# Altium PCB Uno_2022-03-31.pcbdoc
Units mil, origin at the board's own origin, x right, y up, seen from the top; angles counter-clockwise.
Board outline 3976.73 x 3110 mil, 2 copper layers (Top Layer, Bottom Layer); 40 components, 49 nets, 235 pads, 163 vias.
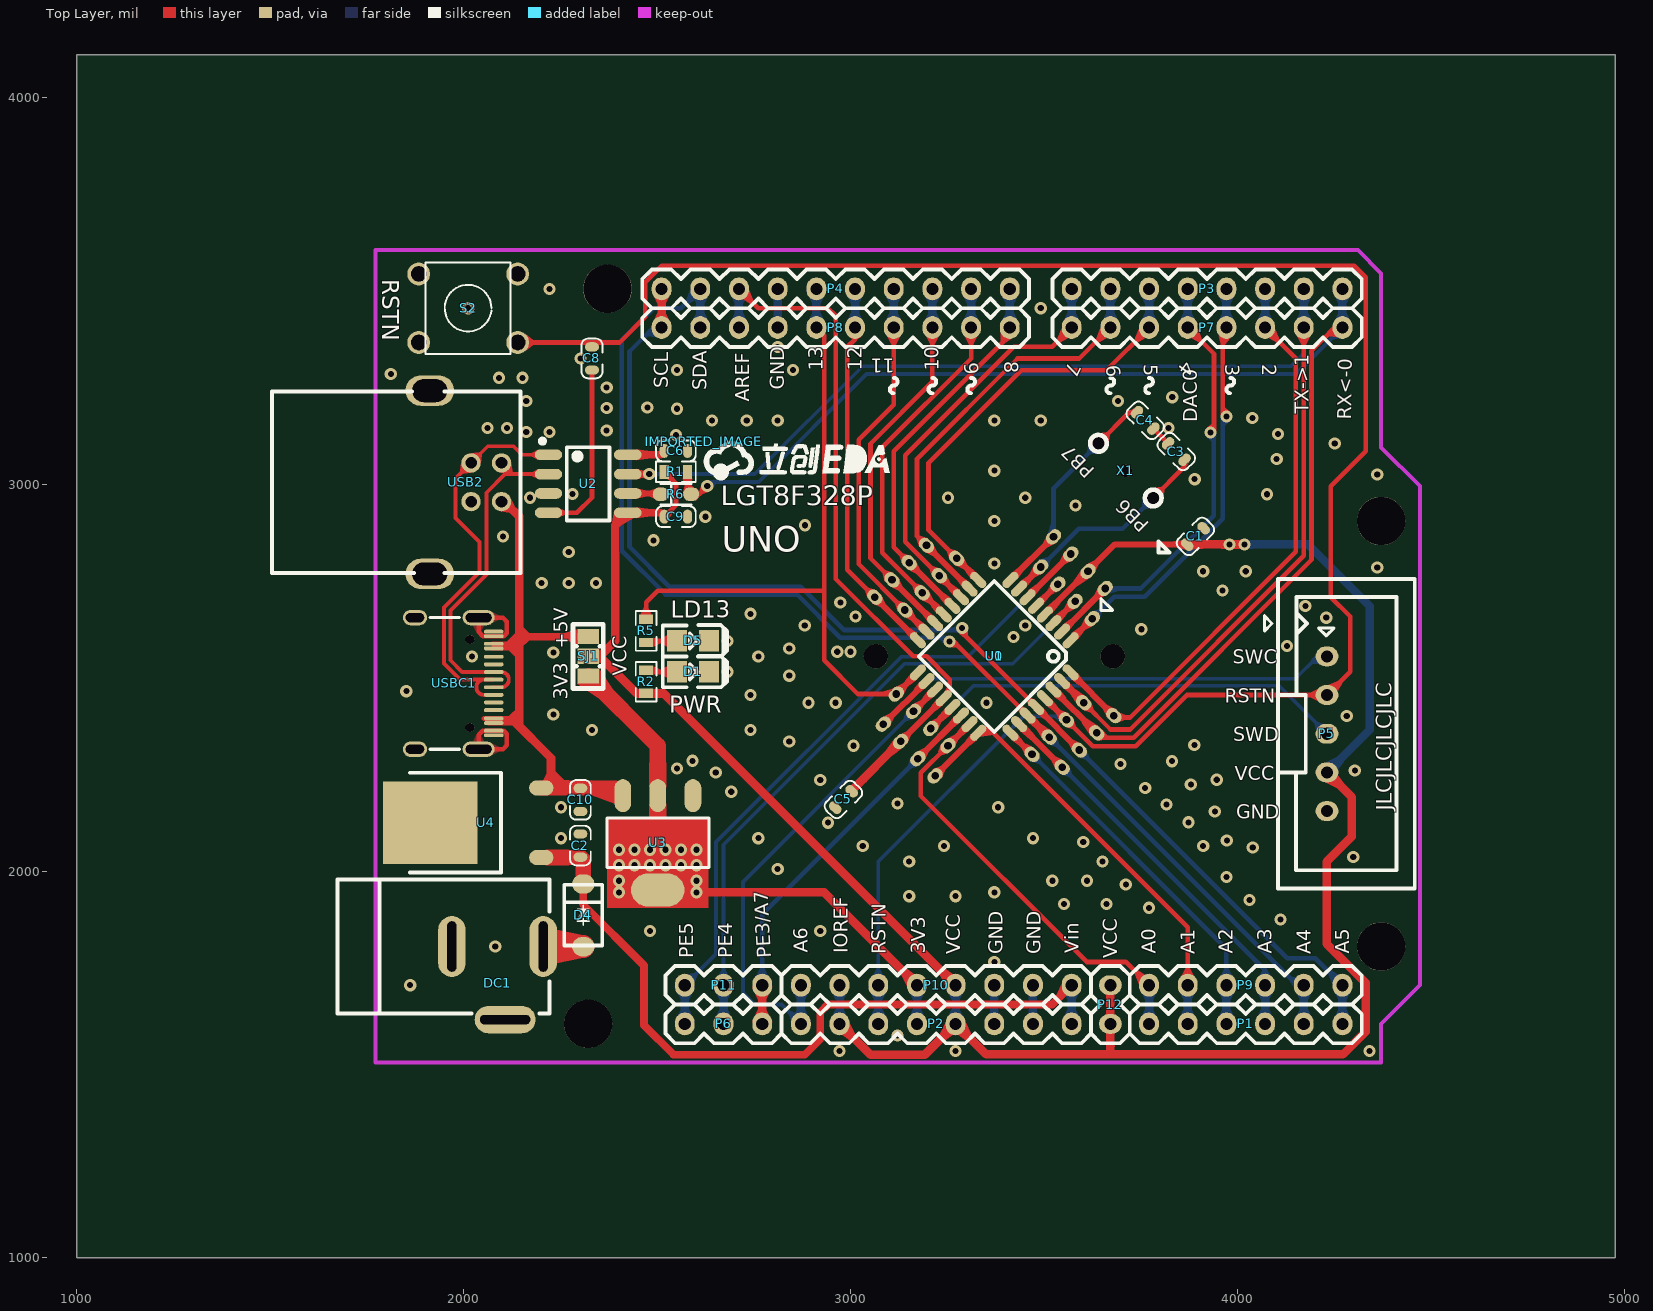
[diagram p0: Top Layer view]
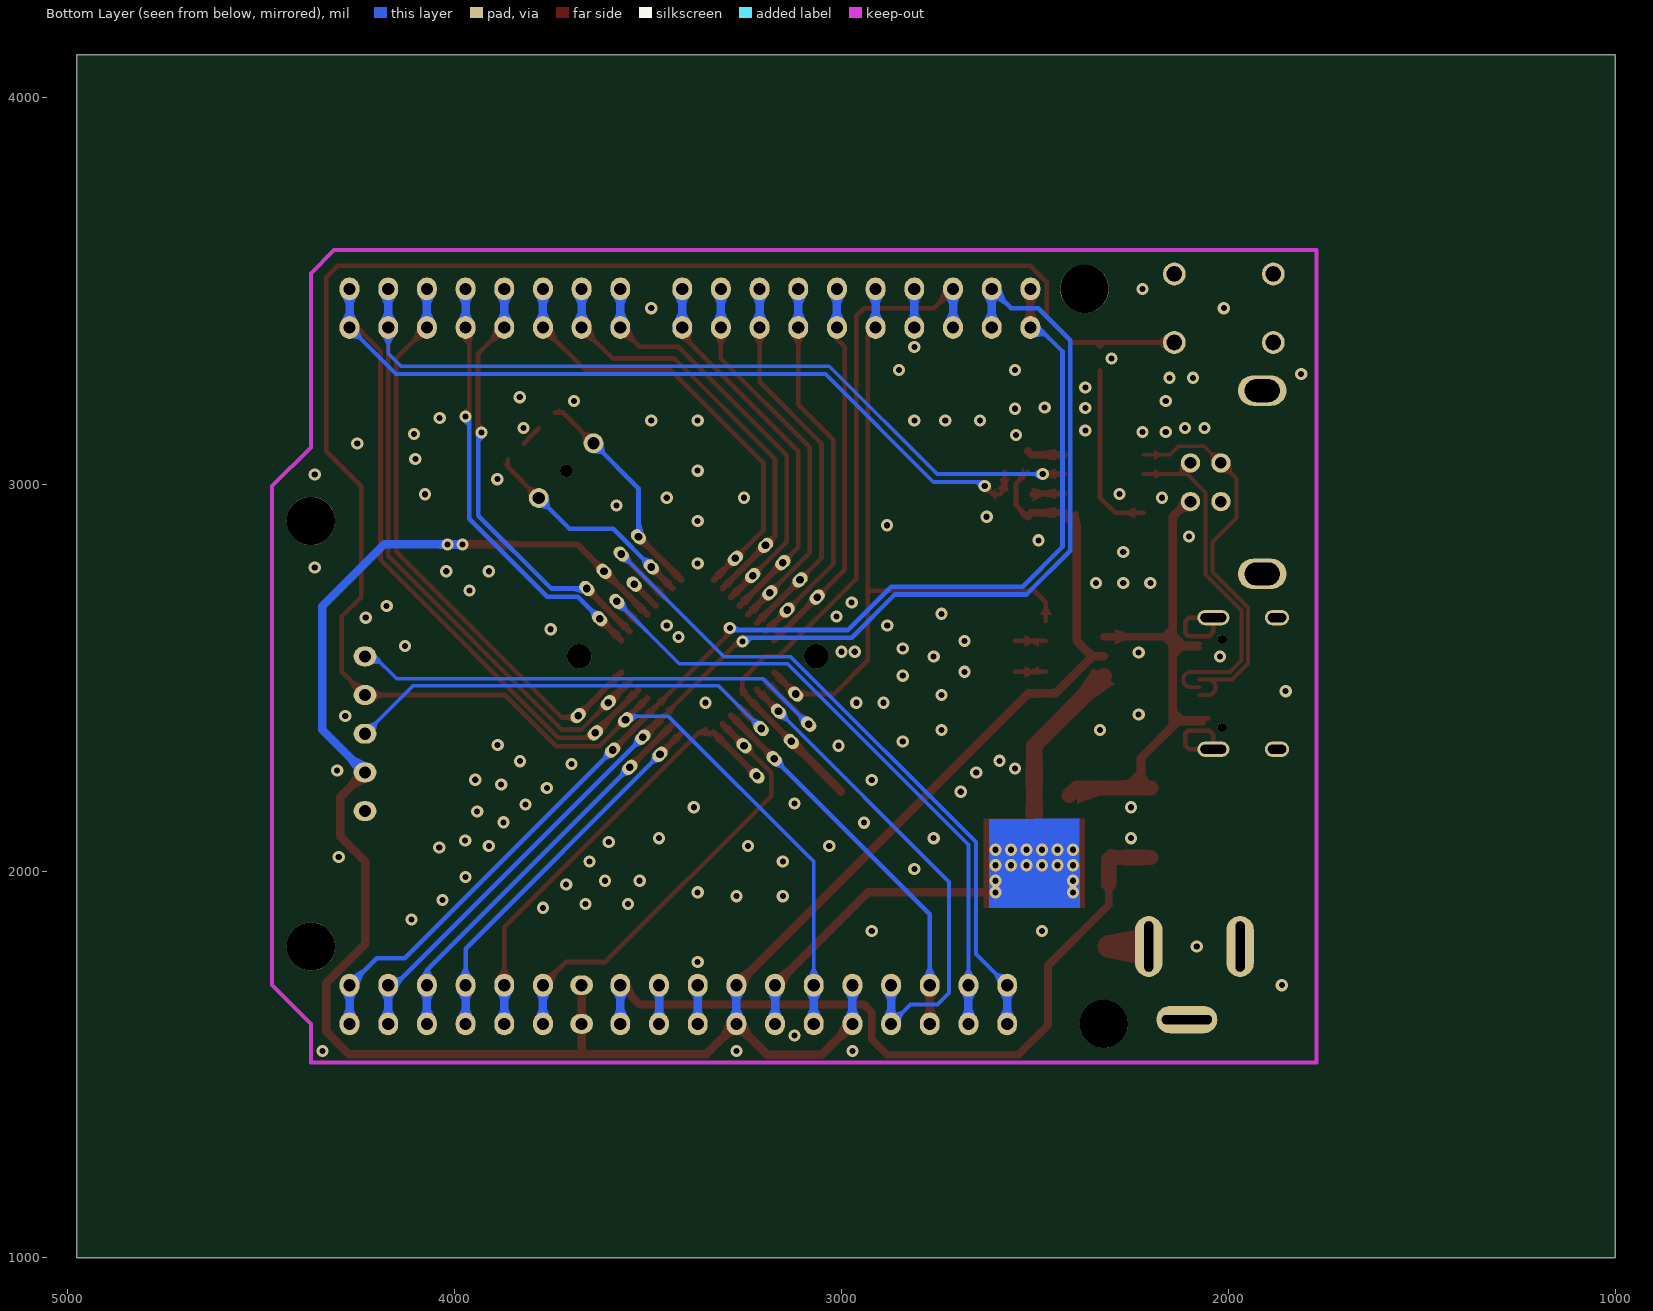
[diagram p1: Bottom Layer view, seen from below]

## Layer stack, top to bottom
Top Layer: signal copper (thickness not stored)
Dielectric: dielectric 12.6, FR-4, Dk 4.8
Bottom Layer: signal copper (thickness not stored)

## Board outline
4976.73,1000 1000,1000 1000,4110 4976.73,4110

## Components (designator, comment, footprint, x,y, rotation, side; value= is the part's Value field where it differs from the comment)
C1 "10uF" C0603 3891.73,2865 r225 top
C2 "10uF" C0603 2301.73,2066 r270 top
C3 "22pF" C0603 3842.24,3084.5 r135 top
C4 "22pF" C0603 3761.73,3165 r315 top
C5 "100nF" C0603 2981.73,2185 r225 top
C6 "100nF" C0603 2548.73,3086.1 r0 top
C8 "100nF" C0603 2331.73,3325 r90 top
C9 "100nF" C0603 2548.73,2916.1 r0 top
C10 "10uF" C0603 2301.73,2184 r90 top
D1 "LED" LED-0805 2592.43,2515.05 r180 top
D4 "SS34" SMA(DO-214AC) 2309.23,1889.5 r90 top
D5 "LED" LED-0805 2592.43,2595.05 r180 top
DC1 "DC005-2.5MM" DC-IN-TH_DC-5520-AK 2221.73,1805 r90 top
IMPORTED_IMAGE "IMPORTED_IMAGE" IMPORTED_IMAGE 2620.98,3110.37 r0 top
P1 "Header-Male-2.54_1x6" 1X6_0.8N 4021.73,1605 r0 top
P2 "Header-Male-2.54_1x8" 1X8_0.8N 3221.73,1605 r180 top
P3 "Header-Male-2.54_1x8" 1X8_0.8N 3921.73,3505 r0 top
P4 "Header-Male-2.54_1x10" 1X10_0.8N_100MIL 2961.73,3505 r0 top
P5 "LGT-Link-2.54-2X5P" HDR-IDC-2.54-2X5P-AK_HR 4281.73,2355 r270 top
P6 "Header-Female-2.54_1x3" 1X3_0.8N_100MIL 2671.73,1605 r0 top
P7 "Header-Male-2.54_1x8" 1X8_0.8N 3921.73,3405 r0 top
P8 "Header-Male-2.54_1x10" 1X10_0.8N_100MIL 2961.73,3405 r0 top
P9 "Header-Male-2.54_1x6" 1X6_0.8N 4021.73,1705 r0 top
P10 "Header-Male-2.54_1x8" 1X8_0.8N 3221.73,1705 r180 top
P11 "Header-Female-2.54_1x3" 1X3_0.8N_100MIL 2671.73,1705 r0 top
P12 "Header-Female-2.54_1x2" 1X2_0.8N 3671.73,1655 r90 top
R1 "10K" R0603W 2548.73,3032.1 r180 top
R2 "1k" R0603W 2471.73,2489.4 r270 top
R5 "1k" R0603W 2471.73,2620.6 r90 top
R6 "1k" SOD-323_L1.8-W1.3-LS2.5-A 2548.73,2974.1 r0 top
S2 "TS665CJ-A" SW-TH_4PIN-L6.00-W6.00 2011.73,3455 r0 top
SJ1 "JUMPER-PAD-3-2OF3_NC_BY_PASTE" JUMPER_SOLDER 2321.73,2555 r90 top
U0 "LGT8F328P_Socket_LQFP32" QFP32-0.8-TP01NT 3371.73,2555 r135 top
U1 "LGT8F328P-QFP32L" TQFP32-08-CMJ-CHECKOK 3371.73,2555 r225 top
U2 "CH340N" SOP8_150MIL_JX 2321.73,3001.1 r270 top
U3 "1117-3.3" SOT-223_L6.5-W3.5-P2.30-LS7.0-BR 2502.23,2073 r90 top
U4 "7805" TO252 2011.73,2125 r90 top
USB2 "USB B 90" USB-M-49-AK 2146.73,3005 r90 top
USBC1 "TYPE-C-31-M-12" USB-TYPE-C_16PIN-MALE-TYPE-C-31-M-12-AK 1771.73,2485 r270 top
X1 "16MHz" OSC-49S-A 3711.73,3035 r315 top

## Footprints (in the part's own frame and the unit in brackets; to place one, negate y for a bottom-side part, rotate by r counter-clockwise, add the part's x,y. Pads: shape width x height; smd on the part's side, far side on the other; paste and mask are expansions set on the pad)
1X2_0.8N [mm]
  oval 1.3x1.5 hole 0.8: 1(-1.27,0) 2(1.27,0)
  silkscreen extent -2.54,-1.27 2.54,1.27
1X3_0.8N_100MIL [mm]
  oval 1.3x1.5 hole 0.8: 1(-2.54,0) 2(0,0) 3(2.54,0)
  silkscreen extent -3.81,-1.27 3.81,1.27
1X6_0.8N [mm]
  oval 1.3x1.5 hole 0.8: 1(-6.35,0) 2(-3.81,0) 3(-1.27,0) 4(1.27,0) 5(3.81,0) 6(6.35,0)
  silkscreen extent -7.62,-1.27 7.62,1.27
1X8_0.8N [mm]
  oval 1.3x1.5 hole 0.8: 1(-8.89,0) 2(-6.35,0) 3(-3.81,0) 4(-1.27,0) 5(1.27,0) 6(3.81,0) 7(6.35,0) 8(8.89,0)
  silkscreen extent -10.16,-1.27 10.16,1.27
1X10_0.8N_100MIL [mm]
  oval 1.3x1.5 hole 0.8: 1(-11.43,0) 2(-8.89,0) 3(-6.35,0) 4(-3.81,0) 5(-1.27,0) 6(1.27,0) 7(3.81,0) 8(6.35,0) 9(8.89,0) 10(11.43,0)
  silkscreen extent -12.7,-1.27 12.7,1.27
C0603 [mil]
  oval 24x36 smd: 1(-30,0) 2(30,0)
  silkscreen extent -51,-27 51,27
DC-IN-TH_DC-5520-AK [mm]
  oval 4x1.8 hole 0.6 slot 3.3 at 0 deg: 1(0,0.406) 2(0,6.406)
  oval 1.8x4 hole 0.6 slot 3.3 at 90 deg: 3(-4.8,2.906)
  silkscreen extent -4.4,0 4.4,13.91
HDR-IDC-2.54-2X5P-AK_HR [mm]
  oval 1.3x1.5 hole 0.8: 1(-5.08,-1.27) 3(-2.54,-1.27) 5(0,-1.27) 7(2.54,-1.27) 9(5.08,-1.27)
  silkscreen extent -10.16,-4.5 10.16,4.5
IMPORTED_IMAGE [mil]
  silkscreen extent 0,-100 480,0
JUMPER_SOLDER [mil]
  rect 39.37x56 smd: 1(-51,0) 2(0,0) 3(51,0)
  silkscreen extent -83,-39 83,39
LED-0805 [mil]
  rect 51.2x55.1 smd: 1(40.7,0.05) 2(-42,0.05)
  silkscreen extent -88,-41 78,40
OSC-49S-A [mm]
  round 1.3 hole 0.8: 1(-2.54,0) 2(2.54,0)
  round 0.8 hole 0.8 unplated: ""(0,0)
  silkscreen extent -3.09,-0.55 3.09,0.55
QFP32-0.8-TP01NT [mm]
  oval 0.8x1.1 hole 0.5: 1(-2.8,-6.3) 2(-2,-8.3) 3(-1.2,-6.3) 4(-0.4,-8.3) 5(0.4,-6.3) 6(1.2,-8.3) 7(2,-6.3) 8(2.8,-8.3) 17(2.8,6.3) 18(2,8.3) 19(1.2,6.3) 20(0.4,8.3) 21(-0.4,6.3) 22(-1.2,8.3) 23(-2,6.3) 24(-2.8,8.3)
  oval 1.1x0.8 hole 0.5: 9(6.3,-2.8) 10(8.3,-2) 11(6.3,-1.2) 12(8.3,-0.4) 13(6.3,0.4) 14(8.3,1.2) 15(6.3,2) 16(8.3,2.8) 25(-6.3,2.8) 26(-8.3,2) 27(-6.3,1.2) 28(-8.3,0.4) 29(-6.3,-0.4) 30(-8.3,-1.2) 31(-6.3,-2) 32(-8.3,-2.8)
  round 1.6 hole 1.6 unplated: ""(-5.5,-5.5) ""(5.5,5.5)
  silkscreen extent -3.31,-12.95 -2.29,-12.45
R0603W [mil]
  rect 24x36 smd: 1(-30,0) 2(30,0)
  silkscreen extent -51,-27 51,27
SMA(DO-214AC) [mil]
  oval 50x57.9 smd: 1(-85,0) 2(77,0)
  silkscreen extent -82,-49 75,49
SOD-323_L1.8-W1.3-LS2.5-A [mil]
  oval 42.13x36 smd: 1(-39,0) 2(39,0)
  silkscreen extent -39,-28 39,28
SOP8_150MIL_JX [mm]
  oval 0.7x1.8 smd: 1(-1.905,-2.601) 2(-0.635,-2.601) 3(0.635,-2.601) 4(1.905,-2.601) 5(1.905,2.601) 6(0.635,2.601) 7(-0.635,2.601) 8(-1.905,2.601)
  silkscreen extent -2.95,-3.15 2.4,1.4
SOT-223_L6.5-W3.5-P2.30-LS7.0-BR [mil]
  oval 85x43 smd: 1(122,-90.5) 2(122,0.5) 3(122,90.5)
  oval 85x138 smd: 4(-122,0.5)
  silkscreen extent -64,-132 64,132
SW-TH_4PIN-L6.00-W6.00 [mil]
  round 59.05 hole 39.36: 1(-127.95,88.59) 2(127.95,88.59) 3(-127.95,-88.59) 4(127.95,-88.59)
  silkscreen extent -111,-118 110,118
TO252 [mil]
  oval 39.4x63 smd: 1(-90,-189) 2(90,-189)
  rect 212.6x244.1 smd: 3(0,98)
  silkscreen extent -129,-85 129,151
TQFP32-08-CMJ-CHECKOK [mil]
  oval 50x22 smd: 1(-169,110.17) 2(-169.07,78.7) 3(-169,47.23) 4(-169,15.7) 5(-169,-15.84) 6(-169,-47.23) 7(-169,-78.63) 8(-169,-110.17) 17(169,-110.17) 18(169.07,-78.7) 19(169,-47.23) 20(169,-15.84) 21(169,15.7) 22(169,47.23) 23(169.07,78.7) 24(169,110.17)
  oval 22x50 smd: 9(-110.17,-169) 10(-78.63,-169) 11(-47.23,-169) 12(-15.7,-169) 13(15.84,-169) 14(47.23,-169) 15(78.7,-169.07) 16(110.17,-169) 25(110.17,169) 26(78.7,169.07) 27(47.23,169) 28(15.84,169) 29(-15.7,169) 30(-47.23,169) 31(-78.7,169.07) 32(-110.17,169)
  silkscreen extent -138,-138 138,138
USB-M-49-AK [mil]
  round 50 hole 30: 1(-50,48.82) 2(50,48.82) 3(50,127.56) 4(-50,127.56)
  oval 78.74x125.98 hole 59.06 slot 90.55 at 90 deg: 5(-237.01,234.25) 6(237.01,234.25)
  silkscreen extent -235,0 235,642
USB-TYPE-C_16PIN-MALE-TYPE-C-31-M-12-AK [mm]
  oval 1x2.1 hole 0.6 slot 1.7 at 90 deg: 0(-4.32,6.78) 0(4.32,6.78)
  oval 1x1.6 hole 0.6 slot 1.2 at 90 deg: 0(-4.32,2.6) 0(4.32,2.6)
  oval 0.25x1.3 smd: A1(-3.4,7.77) A4(-2.6,7.77) A5(-1.25,7.77) A6(-0.25,7.77) A7(0.25,7.77) A8(1.25,7.77) A9(2.6,7.77) A12(3.4,7.77) B1(3.1,7.77) B4(2.3,7.77) B5(1.75,7.77) B6(0.75,7.77) B7(-0.75,7.77) B8(-1.75,7.77) B9(-2.3,7.77) B12(-3.1,7.77)
  round 0.6 hole 0.6 unplated: ""(-2.89,6.2) ""(2.89,6.2)
  silkscreen extent -4.32,3.61 4.32,5.52

## Free pads (board coordinates)
  round 125 hole 125 unplated: ""(2321.73,1605) ""(2371.73,3505) ""(4371.73,1805) ""(4371.73,2905)

## Via types
v1: diameter 31.5, hole 15.75, Top Layer to Bottom Layer, tented both sides, 163 vias

## Nets (pads, with @x,y where several pads share a name; then routed paths per layer and width w, separated by ;. In a path a pad name is that pad's centre, name@x,y a point inside that pad or via, vN(x,y) a via of type N, cw(c..) or ccw(c..) an arc to the next point about the centre after c; other vN are vias at no path point)
3V: C6.1 U2.8 | length 98.7
  Top Layer w20: U2.8 2508.73,3076.1 C6.1
3V3: P2.5 P10.5 SJ1.1 U3.2 U3.4 | length 1395
  Top Layer w22: v1(2601.73,1945) 2931.73,1945 P10.5
  Top Layer w43: SJ1.1 2501.73,2324 U3.2 ; U3.4 U3.2@2501.73,2193
  Bottom Layer w22: P2.5 P10.5
  other v1: 2401.73,1945 2401.73,1975 2601.73,1975 2401.73,2015 2441.73,2015 2481.73,2015 2521.73,2015 2561.73,2015 2601.73,2015 2401.73,2055 2441.73,2055 2481.73,2055 2521.73,2055 2561.73,2055 2601.73,2055
$BOARDOUTLINENET: 
+5V: C10.2 SJ1.3 U3.3 U4.2 USB2.1 USBC1.A4 USBC1.A9 USBC1.B4 USBC1.B9 | length 3057.2
  Top Layer w12: USBC1.B4@2052.28,2394.45 2074.69,2394.45 2119.21,2394.45 2148.73,2423.97 ; USBC1.A9@2064.1,2382.63 USBC1.A9@2074.69,2382.63 ; USBC1.B9@2074.69,2575.55 2140.28,2575.55 2170.73,2606 2148.73,2628 2148.73,2664.4 ; USBC1.A4@2074.69,2587.36 2124.09,2587.36 2151.73,2615 2151.73,2625 ; USBC1.A9@2074.73,2382.6 2128.13,2382.6 ; USBC1.B4@2074.73,2394.5 2130.73,2394.5 2231.73,2293.5 2231.73,2255 2273.73,2213 2301.73,2213 2220.73,2213 2220.73,2290 2128.13,2382.6 ; USBC1.B9@2074.73,2575.5 USBC1.B9@2102.23,2575.5 ; USBC1.B9@2095.9,2575.55 2118.84,2575.55 2148.73,2545.66 ; 2104.13,2587.4 2113.63,2587.4 2138.73,2612.5 2138.73,2914.2 USB2.1 2111.73,2955 2148.73,2918 2148.73,2622 USBC1.B9@2102.23,2575.5 ; 2104.93,2578.2 USBC1.B9@2102.23,2575.5 ; 2138.73,2644.66 2138.73,2393.2 2128.13,2382.6 ; 2148.73,2362.88 2148.73,2649.45 ; 2220.73,2251.09 2257.82,2214 C10.2
  Top Layer w20: 2131.73,2585 2152.73,2606 2170.73,2606 SJ1.3
  Top Layer w39.37: U4.2 2391.73,2215 U3.3
A0: P1.1 P9.1 U0.23 U1.23 | length 1130.6
  Top Layer w12: U0.23@3252.03,2324 3181.73,2253.7 3181.73,2194 3610.73,1765 3711.73,1765 P9.1
  Top Layer w16: U0.23@3252.03,2324 U1.23
  Bottom Layer w22: P1.1 P9.1
A1: P1.2 P9.2 U0.24 U1.24 | length 1315.4
  Top Layer w12: U0.24@3218.53,2246 U1.24 3369.13,2357.6 3871.73,1855 P9.2
  Top Layer w16: U0.24@3218.53,2246 U1.24
  Bottom Layer w22: P1.2 P9.2
A2: P1.3 P9.3 U0.25 U1.25 | length 983.9
  Top Layer w16: U1.25 U0.25@3469.13,2301.7
  Bottom Layer w12: U0.25@3469.13,2301.7 3971.73,1799.2 P9.3
  Bottom Layer w22: P1.3 P9.3
A3: P1.4 P9.4 U0.26 U1.26 | length 1038.3
  Top Layer w16: U1.26 U0.26
  Bottom Layer w12: U0.26 4071.73,1743.7 P9.4
  Bottom Layer w22: P1.4 P9.4
A4/SDA: P1.5 P4.2 P8.2 P9.5 U0.27 U1.27 | length 3236.1
  Top Layer w12: v1(3255.73,2593) 3266.93,2593 U1.27
  Top Layer w16: U1.27 U0.27@3513.73,2346.3
  Bottom Layer w12: P4.2 2561.73,3455 2491.73,3455 2408.73,3372 2408.73,2828 2521.73,2715 2861.73,2715 2973.73,2603 3255.73,2603 v1(3255.73,2593) ; U0.27@3513.73,2346.3 4155.03,1705 P9.5
  Bottom Layer w22: P8.2 P4.2 ; P1.5 P9.5
A5/SCL: P1.6 P4.1 P8.1 P9.6 U0.28 U1.28 | length 3137.3
  Top Layer w12: v1(3288.73,2628) 3288.73,2615.6 U1.28
  Top Layer w16: U1.28 U0.28
  Top Layer w22: P8.1 P4.1
  Bottom Layer w12: P8.1 2490.73,3405 2428.73,3343 2428.73,2838 2531.73,2735 2871.73,2735 2983.73,2623 3283.73,2623 v1(3288.73,2628) ; U0.28 4129.53,1775 4201.73,1775 P9.6
  Bottom Layer w22: P1.6 P9.6
A6: P2.8 P10.8 U0.19 U1.19 | length 1272.9
  Top Layer w16: U0.19@3163.03,2413 U1.19
  Bottom Layer w10: P2.8 2821.73,1655 2751.73,1655 2721.73,1685 2721.73,1971.7 U0.19@3163.03,2413
  Bottom Layer w22: P2.8 P10.8
AREF: C5.1 P4.3 P8.3 U0.20 U1.20 | length 1856.5
  Top Layer w12: P4.3 2761.73,3455 2941.73,3455 2961.73,3435 2961.73,2755 3161.73,2555 3196.73,2555 3256.73,2495 3256.73,2462.4 U1.20
  Top Layer w16: U0.20@3129.53,2335 U1.20
  Top Layer w22: C5.1@3002.23,2205.5 3002.23,2207.7 U0.20@3129.53,2335
  Bottom Layer w22: P8.3 P4.3
D0/RX: P3.8 P7.8 R1.1 R6.2 U0.30 U1.30 | length 3576.1
  Top Layer w12: R1.1 2578.73,2986.34 2590.97,2974.1 2608.83,2974.1 v1(2629.73,2995) ; U0.30 3648.53,2345 3731.73,2345 4191.73,2805 4191.73,3345 4251.73,3405 P7.8
  Top Layer w16: U1.30 U0.30
  Bottom Layer w10: v1(2629.73,2995) 2640.73,3006 2762.73,3006 3041.73,3285 4151.73,3285 P7.8
  Bottom Layer w22: P7.8 P3.8
D1/TX: P3.7 P7.7 U0.31 U1.31 U2.7 | length 3496.3
  Top Layer w12: U0.31@3602.73,2435.3 3672.03,2366 3722.73,2366 4171.73,2815 P7.7
  Top Layer w16: U2.7 v1(2479.73,3026.1) ; U1.31 U0.31@3602.73,2435.3
  Bottom Layer w10: v1(2479.73,3026.1) 2752.63,3026.1 3031.73,3305 4138.73,3305 4171.73,3338 P7.7
  Bottom Layer w22: P7.7 P3.7
D2: P3.6 P7.6 U0.32 U1.32 | length 1519.9
  Top Layer w12: U0.32 3685.63,2397 3722.73,2397 3727.63,2401.9 4150.73,2825 4150.73,3326 P7.6
  Top Layer w16: U1.32 U0.32@3680.73,2401.8
  Bottom Layer w22: P7.6 P3.6
D3: P3.5 P7.5 U0.1 U1.1 | length 1128.9
  Top Layer w12: v1(3971.73,3175) 3962.73,3184 3962.73,3396 P7.5
  Top Layer w16: U1.1 U0.1@3625.03,2652.4
  Bottom Layer w12: U0.1 3681.63,2709 3760.73,2709 3962.73,2911 3962.73,3166 v1(3971.73,3175)
  Bottom Layer w22: P7.5 P3.5
D4: P3.4 P7.4 U0.2 U1.2 | length 1137.3
  Top Layer w12: P7.4 3939.73,3337 3939.73,3143 v1(3930.73,3134)
  Top Layer w16: U1.2 U0.2@3658.43,2730.4
  Bottom Layer w12: U0.2@3658.43,2730.4 3750.13,2730.4 3938.73,2919 3938.73,2941 3938.73,3126 v1(3930.73,3134)
  Bottom Layer w22: P7.4 P3.4
D5: P3.3 P7.3 U0.9 U1.9 | length 1170.7
  Top Layer w12: U0.9 3201.73,2880.9 3201.73,3055 3441.73,3295 3661.73,3295 P7.3
  Top Layer w16: U0.9 U1.9
  Bottom Layer w22: P7.3 P3.3
D6: P3.2 P7.2 U0.10 U1.10 | length 1132.1
  Top Layer w12: U0.10@3196.33,2841.7 3171.73,2866.3 3171.73,3065 3431.73,3325 3591.73,3325 P7.2
  Top Layer w16: U0.10@3196.33,2841.7 U1.10
  Bottom Layer w22: P7.2 P3.2
D7: P3.1 P7.1 U0.11 U1.11 | length 1093.4
  Top Layer w12: U0.11@3229.73,2763.7 3141.73,2851.7 3141.73,3075 3421.73,3355 3521.73,3355 P7.1
  Top Layer w16: U0.11@3229.73,2763.7 U1.11
  Bottom Layer w22: P7.1 P3.1
D8: P4.10 P8.10 U0.12 U1.12 | length 1006.5
  Top Layer w12: U0.12@3151.73,2797.2 3111.73,2837.2 3111.73,3085 3411.73,3385 P8.10
  Top Layer w16: U0.12@3151.73,2797.2 U1.12
  Bottom Layer w22: P8.10 P4.10
D9: P4.9 P8.9 U0.13 U1.13 | length 1002.9
  Top Layer w12: U0.13 3081.73,2822.8 3081.73,3095 3311.73,3325 P8.9
  Top Layer w16: U0.13 U1.13
  Bottom Layer w22: P8.9 P4.9
D10/SS: P4.8 P8.8 U0.14 U1.14 | length 999.4
  Top Layer w12: U0.14@3107.23,2752.7 3051.73,2808.3 3051.73,3105 3211.73,3265 P8.8
  Top Layer w16: U0.14@3107.23,2752.7 U1.14
  Bottom Layer w22: P8.8 P4.8
D11/MOSI: P4.7 P8.7 U0.15 U1.15 | length 995.8
  Top Layer w12: P8.7 3111.73,3205 3021.73,3115 3021.73,2793.7 U0.15
  Top Layer w16: U0.15 U1.15
  Bottom Layer w22: P8.7 P4.7
D12/MISO: P4.6 P8.6 U0.16 U1.16 | length 992.3
  Top Layer w12: P8.6 3011.73,3375 2991.73,3355 2991.73,2779.2 U0.16@3062.73,2708.2
  Top Layer w16: U0.16@3062.73,2708.2 U1.16
  Bottom Layer w22: P8.6 P4.6
D13/SCK: P4.5 P8.5 R5.2 U0.17 U1.17 | length 1821.4
  Top Layer w12: R5.2@2471.73,2646.2 2471.73,2695 2501.73,2725 2931.73,2725 2931.73,2755 ; P8.5 2931.73,3385 2931.73,2545 3019.13,2457.6 U0.17
  Top Layer w16: U0.17 U1.17
  Bottom Layer w22: P8.5 P4.5
D+: U2.1 USB2.3 USBC1.A6 USBC1.B6 | length 1086.9
  Top Layer w10: USBC1.B6@2063.73,2455.47 USBC1.B6@2052.26,2455.47 ; USBC1.B6@2074.69,2455.47 USBC1.B6@2052.26,2455.47 ; U2.1 2150.63,3076.1 2128.73,3098 2062.13,3098 2019.13,3055 1978.73,3014.6 1978.73,2913 2040.73,2851 2040.73,2773 1948.73,2681 1948.73,2537 1990.89,2494.84 2074.69,2494.84 2052.57,2494.84 ccw(c2052.57,2475) 2032.73,2475 ccw(c2052.26,2475) USBC1.B6@2052.26,2455.47
D-: U2.2 USB2.2 USBC1.A7 USBC1.B7 | length 934.9
  Top Layer w10: USBC1.A7@2074.69,2475.16 USBC1.A7@2096.89,2475.16 ; USBC1.A7@2083.04,2475.16 USBC1.A7@2096.89,2475.16 ; USB2.2 2126.83,3026.1 ; U2.2 2126.83,3026.1 ; USBC1.A7@2096.89,2475.16 ccw(c2096.89,2495) 2116.73,2495 ccw(c2097.2,2495) 2097.2,2514.53 2074.69,2514.53 1996.2,2514.53 1965.73,2545 1965.73,2674 2058.73,2767 2058.73,2978 2106.83,3026.1 2126.83,3026.1
DC1_1: D4.1 DC1.1 | length 103.7
  Top Layer w59.05: DC1.1 2308.73,1805 D4.1
GND: C1.1 C2.1 C3.2 C4.2 C5.2 C6.2 C9.2 C10.1 D1.2 D5.2 DC1.2 DC1.3 P2.2 P2.3 P4.4 P5.9 P8.4 P10.2 P10.3 S2.1 S2.2 U0.5 U1.5 U2.3 U3.1 U4.3 USB2.4 USB2.5 USB2.6 USBC1.0 USBC1.A1 USBC1.A12 USBC1.B1 USBC1.B12 | length 885
  Top Layer w12: USBC1.B1@2074.69,2362.95 2049.68,2362.95 2038.66,2351.93 2038.66,2314.92 2101.63,2314.9 2111.73,2325 2111.73,2355 2103.83,2362.9 USBC1.B1@2074.73,2362.9 ; C4.2@3782.23,3144.5 3801.73,3125 C3.2@3821.73,3105 ; 2038.66,2618.07 2049.68,2607.05 2074.69,2607.05 2103.78,2607.05 2111.73,2615 2111.73,2645 2101.65,2655.08 2038.66,2655.08 2038.66,2618.07
  Top Layer w16: U1.5@3480.03,2686 U0.5
  Bottom Layer w22: P8.4 P4.4 ; P2.3 P10.3 ; P2.2 P10.2
  other v1: 2971.73,1535 3271.73,1535 4341.73,1535 3121.73,1575 1861.73,1705 3371.73,1765 2081.73,1805 2481.73,1845 2921.73,1845 4111.73,1875 3771.73,1905 3551.73,1915 3661.73,1915 4031.73,1925 3151.73,1935 3271.73,1935 3371.73,1945 3711.73,1965 3521.73,1975 3611.73,1975 3971.73,1985 2811.73,2005 3151.73,2025 3651.73,2025 4299.73,2036 4039.73,2061 3031.73,2065 3241.73,2065 3911.73,2065 3601.73,2075 3972.73,2079 2251.73,2085 2761.73,2085 3471.73,2085 2941.73,2125 3873.73,2126 3941.73,2154 2251.73,2165 3381.73,2165 3816.73,2172 3121.73,2175 2691.73,2205 3761.73,2215 3879.73,2224 2921.73,2235 3946.73,2236 2651.73,2255 4303.73,2260 2551.73,2265 3697.73,2277 3830.73,2284 2591.73,2285 3007.73,2324 3888.73,2326 2841.73,2335 2331.73,2365 2741.73,2365 4282.73,2401 2231.73,2405 2891.73,2435 2961.73,2435 3351.73,2435 2741.73,2455 1851.73,2465 2841.73,2505 2681.73,2515 2021.73,2555 2761.73,2555 2231.73,2565 2965.73,2567 2999.73,2567 2841.73,2575 4128.73,2582 2681.73,2595 3421.73,2605 3751.73,2625 2881.73,2635 3451.73,2635 4229.73,2655 3012.73,2658 2741.73,2665 4175.73,2685 2973.73,2694 3961.73,2725 2201.73,2745 2271.73,2745 2341.73,2745 3911.73,2775 4021.73,2775 4361.73,2785 3371.73,2795 2271.73,2825 2490.73,2855 2101.73,2865 2882.73,2894 3371.73,2905 2624.73,2916 3581.73,2945 2171.73,2965 3251.73,2965 3451.73,2965 4076.73,2974 2281.73,2975 3889.73,3013 4361.73,3025 3371.73,3035 4101.73,3065 4251.73,3105 2548.73,3127 4104.73,3130 2161.73,3135 2221.73,3135 2369.73,3139 2061.73,3145 2111.73,3145 3821.73,3145 2641.73,3165 2731.73,3165 2811.73,3165 3371.73,3165 3491.73,3165 4038.73,3171 2551.73,3195 2369.73,3197 2474.73,3198 2161.73,3215 3691.73,3215 3831.73,3225 2369.73,3250 2091.73,3275 2151.73,3275 1811.73,3285 2551.73,3295 2851.73,3295 2301.73,3325 2811.73,3355 2011.73,3455 3491.73,3455 2221.73,3505
NULL: 
PB6: C3.1 U0.7 U1.7 X1.2 | length 576.8
  Top Layer w12: X1.2 3862.73,3044.6 C3.1@3862.73,3064
  Top Layer w16: U1.7 U0.7@3491.43,2786
  Bottom Layer w12: U0.7 3590.38,2885 3703.13,2885 X1.2
PB7: C4.1 U0.8 U1.8 X1.1 | length 580.9
  Top Layer w12: X1.1 3720.83,3185.5 C4.1@3741.23,3185.5
  Top Layer w16: U1.8 U0.8@3524.93,2864
  Bottom Layer w12: U0.8@3524.93,2864 3524.93,2989.6 X1.1
PE3: P6.3 P11.3 U0.22 U1.22 | length 1010
  Top Layer w16: U0.22@3174.03,2290.5 U1.22
  Top Layer w22: P6.3 P11.3
  Bottom Layer w12: P11.3 2771.73,1888.2 U0.22@3174.03,2290.5
PE4: P6.2 P11.2 U0.3 U1.3 | length 1711.3
  Top Layer w16: U1.3 U0.3@3580.43,2697
  Bottom Layer w10: P11.2 2671.73,2068 3139.73,2536 3419.53,2536 U0.3
  Bottom Layer w22: P6.2 P11.2
PE5: P6.1 P11.1 U0.6 U1.6 | length 1886.5
  Top Layer w16: U1.6 U0.6
  Bottom Layer w10: P11.1 2652.73,1786 2652.73,2075 3131.73,2554 3303.93,2554 U0.6
  Bottom Layer w22: P6.1 P11.1
R2_1: D1.1 R2.1 | length 80
  Top Layer w12: R2.1@2471.73,2515 D1.1
R5_1: D5.1 R5.1 | length 80
  Top Layer w12: R5.1@2471.73,2595 D5.1
RST: C8.2 P2.6 P5.3 P10.6 S2.4 U0.29 U1.29 | length 5676.1
  Top Layer w12: S2.4 2320.32,3366.41 C8.2 2343.14,3366.41 2403.14,3366.41 ; S2.4 2403.13,3366.4 ; U0.29@3558.23,2390.7 3626.03,2323 3737.73,2323 3869.73,2455 P5.3 4291.73,2515 4291.73,2658 4241.73,2708 4241.73,2995 4331.73,3085 4331.73,3535 4301.73,3565 2511.73,3565 2469.23,3522.5 2469.23,3432.5 2403.13,3366.4
  Top Layer w16: U1.29 U0.29@3558.23,2390.7
  Bottom Layer w10: P10.6 3071.73,2025 3446.73,2400 3548.93,2400 U0.29@3558.23,2390.7
  Bottom Layer w22: P2.6 P10.6
RTS#: C8.1 U2.4 | length 458.5
  Top Layer w12: U2.4 2292.83,2926.1 2331.73,2965 C8.1
S$18: 
S$20: 
S$2224: 
S$2229: 
SWC: P5.1 U0.18 U1.18 | length 1377
  Top Layer w16: U0.18 U1.18
  Bottom Layer w10: U0.18 3202.43,2497 4149.73,2497 4207.73,2555 P5.1
SWD: P5.5 U0.21 U1.21 | length 1200.5
  Top Layer w16: U0.21@3207.43,2368.5 U1.21
  Bottom Layer w10: U0.21@3207.43,2368.5 3317.93,2479 4107.73,2479 P5.5
U2_6: R6.1 U2.6 | length 83.2
  Top Layer w16: U2.6 2504.49,2976.1 R6.1@2506.49,2974.1
VCC: C1.2 C9.1 P2.4 P2.7 P5.7 P10.4 P10.7 P12.1 P12.2 R1.2 R2.2 SJ1.2 U0.4 U1.4 U2.5 | length 6095.5
  Top Layer w12: C9.1 2548.73,2946.1 2548.73,3002.1 R1.2
  Top Layer w16: U1.4 3683.43,2844.5 C1.2@3871.23,2844.5
  Top Layer w20: U2.5 2508.73,2926.1 C9.1
  Top Layer w22: U2.5 2391.73,2893.7 2391.73,2595 2351.73,2555 ; P2.7 3051.73,1525 3191.73,1525 P2.4 3350.73,1526 4272.73,1526 4331.73,1585 4331.73,1711 4230.73,1812 4230.73,2024 4295.73,2089 4295.73,2191 P5.7 ; P10.4 2517.33,2459.4 R2.2 2447.33,2459.4 2351.73,2555 ; 3671.73,1526 P12.1 P12.2 ; C1.2@3871.23,2844.5 3979.23,2844.5 v1(3979.73,2844.5) v1(4018.73,2844.5) ; 2351.73,2555 SJ1.2 2351.73,2555
  Bottom Layer w22: P2.7 P10.7 ; P2.4 P10.4 ; v1(3979.73,2844.5) v1(4018.73,2844.5) 4182.23,2844.5 4341.73,2685 4341.73,2365 P5.7
VIN: C2.2 D4.2 P2.1 P10.1 U4.1 | length 1958.2
  Top Layer w20: D4.2 2309.23,1913 2466.23,1756 2466.23,1601.5 2542.73,1525 2881.73,1525 2921.73,1565 2921.73,1635 2941.73,1655 3521.73,1655 P10.1
  Top Layer w39.37: U4.1 2299.73,2035 2301.73,2037 2309.23,2029.5 D4.2
  Bottom Layer w22: P2.1 P10.1
pads on no net: S2.3 U0. USBC1. USBC1.A5 USBC1.A8 USBC1.B5 USBC1.B8 X1.

## Polygon pours and split planes (outlines as drawn)
GND on Bottom Layer (solid): 3961.73,3605 4311.73,3605 4371.73,3545 4371.73,3095 4471.73,2995 4471.73,1705 4371.73,1605 4371.73,1505 1771.73,1505 1771.73,3605 3591.73,3605
GND on Top Layer (solid): 1766.73,1505 1766.73,3600 1771.73,3605 4256.73,3605 4311.73,3605 4376.73,3540 4376.73,3095 4476.73,2995 4476.73,1720 4476.73,1705 4456.73,1685 4376.73,1605 4376.73,1505 4371.73,1500 1771.73,1500 1766.73,1505

## Other copper
Top Layer:
  region net RTS#: 2337.73,3283 2325.73,3283 2325.73,3265 2337.73,3265
  region net VCC: 3675.67,1679.41 3667.8,1679.41 3660.73,1646.41 3682.73,1646.41
  region net VCC: 3675.67,1579.41 3667.8,1579.41 3660.73,1546.41 3682.73,1546.41
  region net VCC: 3667.8,1630.59 3675.67,1630.59 3682.73,1663.59 3660.73,1663.59
  region net PE3: 2797.32,1608.94 2746.14,1608.94 2760.73,1641.94 2782.73,1641.94
  region net PE3: 2797.32,1701.06 2746.14,1701.06 2760.73,1668.06 2782.73,1668.06
  region net +5V: 2205.73,2234.7 2231.68,2219.64 2226.73,2252.7 2214.73,2252.7
  region net +5V: 2226.25,2229.14 2224.3,2199.2 2242.85,2207 2243.63,2219
  region net +5V: 2212.53,2195.3 2212.53,2234.7 2271.59,2234.68 2271.59,2195.32
  region net VIN: 2212.53,2015.3 2212.53,2054.7 2271.59,2054.68 2271.59,2015.32
  region net DC1_1: 2241.16,1848.31 2241.16,1761.69 2308.73,1775.47 2308.73,1834.53
  region net VIN: 2305.28,1991.5 2313.18,1991.5 2328.92,2029.5 2289.55,2029.5
  region net VIN: 2313.18,1941.5 2305.28,1941.5 2299.23,1913 2319.23,1913
  region net D2: 3586.81,2511.28 3571.25,2495.72 3590.35,2480.87 3601.66,2492.19
  region net D1/TX: 3564.61,2488.98 3549.05,2473.42 3568.14,2458.57 3579.46,2469.89
  region net D0/RX: 3542.31,2466.78 3526.75,2451.22 3545.84,2436.37 3557.16,2447.69
  region net RST: 3520.01,2444.48 3504.45,2428.92 3523.54,2414.07 3534.86,2425.39
  region net A5/SCL: 3477.91,2441.98 3462.36,2426.42 3453.16,2442.68 3461.65,2451.17
  region net A5/SCL: 3497.7,2422.19 3482.16,2406.61 3501.28,2391.79 3512.57,2403.12
  region net A4/SDA: 3455.71,2419.78 3440.16,2404.22 3430.96,2420.48 3439.45,2428.97
  region net A4/SDA: 3475.51,2399.98 3459.96,2384.42 3486.85,2361.83 3498.17,2373.14
  region net A3: 3453.31,2377.68 3437.75,2362.12 3464.62,2339.5 3475.94,2350.81
  region net A2: 3431.02,2355.47 3415.44,2339.93 3434.51,2325.06 3445.84,2336.36
  region net A1: 3328.01,2339.92 3312.46,2355.48 3297.6,2336.39 3308.92,2325.07
  region net A1: 3328.01,2339.92 3312.46,2355.48 3303.26,2339.22 3311.75,2330.73
  region net A1: 3349.32,2373.4 3335.08,2346.99 3363.13,2351.6 3369.13,2363.6
  region net A0: 3305.71,2362.12 3290.16,2377.68 3275.3,2358.59 3286.62,2347.27
  region net PE3: 3283.51,2384.43 3267.95,2399.98 3253.11,2380.89 3264.42,2369.57
  region net SWD: 3261.21,2406.72 3245.65,2422.28 3223.03,2395.41 3234.34,2384.1
  region net AREF: 3261.34,2453.05 3240.52,2460.14 3250.73,2475.68 3262.73,2471.6
  region net AREF: 3238.92,2429.04 3223.34,2444.57 3208.52,2425.45 3219.85,2414.16
  region net A6: 3216.72,2451.23 3201.15,2466.77 3186.32,2447.66 3197.65,2436.36
  region net SWC: 3194.41,2473.42 3178.86,2488.98 3164.01,2469.89 3175.32,2458.57
  region net D13/SCK: 3172.2,2495.71 3156.67,2511.29 3141.79,2492.22 3153.09,2480.89
  region net D12/MISO: 3172.21,2614.28 3156.65,2598.72 3141.8,2617.81 3153.12,2629.13
  region net D11/MOSI: 3194.41,2636.58 3178.86,2621.02 3164.01,2640.11 3175.32,2651.43
  region net D10/SS: 3216.71,2658.78 3201.16,2643.22 3186.31,2662.31 3197.62,2673.63
  region net D9: 3238.93,2680.95 3223.33,2665.44 3208.54,2684.58 3219.88,2695.86
  region net D8: 3261.21,2703.28 3245.65,2687.72 3230.81,2706.81 3242.12,2718.13
  region net D7: 3283.5,2725.59 3267.96,2710.01 3253.09,2729.08 3264.39,2740.41
  region net D6: 3305.72,2747.77 3290.15,2732.23 3275.31,2751.33 3286.63,2762.63
  region net D5: 3328.02,2770.07 3312.44,2754.53 3297.62,2773.64 3308.95,2784.94
  region net PB7: 3431.01,2754.52 3415.45,2770.08 3434.55,2784.93 3445.86,2773.61
  region net PB6: 3453.32,2732.23 3437.74,2747.77 3456.81,2762.64 3468.14,2751.34
  region net PE5: 3475.51,2710.02 3459.95,2725.57 3479.04,2740.43 3490.36,2729.11
  region net VCC: 3504.45,2681.08 3520.01,2665.52 3542.64,2692.39 3531.32,2703.7
  region net PE4: 3542.32,2643.23 3526.74,2658.77 3545.81,2673.64 3557.14,2662.34
  region net D4: 3564.61,2621.02 3549.05,2636.58 3568.14,2651.43 3579.46,2640.11
  region net D3: 3586.8,2598.71 3571.26,2614.29 3590.38,2629.11 3601.68,2617.78
  region net 3V3: 2475.23,1993.5 2528.23,1993.5 2523.23,2058 2480.23,2058
  region net +5V: 2390.23,2174 2390.23,2216 2331.18,2234.68 2331.18,2195.32
  region net 3V3: 2523.23,2174 2480.23,2174 2480.23,2109.5 2523.23,2109.5
  region net 3V3: 2523.23,2216 2480.23,2216 2480.23,2280.5 2523.23,2280.5
  region net +5V: 2296.4,2202.02 2295.07,2225.98 2277.43,2219 2278.09,2207
  region net +5V: 2296.4,2202.02 2295.07,2225.98 2277.43,2219 2278.09,2207
  region net +5V: 2295.73,2202 2295.73,2226 2277.73,2220 2277.73,2208
  region net AREF: 3007.19,2218.94 3015.67,2210.45 3041.44,2231.35 3025.88,2246.91
  region net PB7: 3727.79,3190.45 3736.28,3198.94 3724.37,3191.5 3720.83,3179.5
  region net PB6: 3876.18,3059.04 3867.69,3050.55 3856.73,3044.6 3868.73,3048.13
  region net VCC: 3874.76,2856.52 3866.28,2831.06 3910.08,2833.5 3903.53,2855.5
  region net VCC: 3866.28,2831.06 3874.76,2856.52 3835.88,2852.5 3842.72,2836.5
  region net 3V: 2445.78,3062.32 2445.78,3089.88 2475.78,3086.1 2475.78,3066.1
  region net D1/TX: 2445.78,3012.32 2445.78,3039.88 2469.78,3034.1 2469.78,3018.1
  region net U2_6: 2445.78,2962.32 2445.78,2989.88 2469.78,2984.1 2469.78,2968.1
  region net VCC: 2437.85,2912.32 2389.64,2931.1 2383.95,2901.48 2407.29,2893.7
  region net VCC: 2445.78,2912.32 2445.78,2939.88 2475.78,2936.1 2475.78,2916.1
  region net RTS#: 2240.98,2912.32 2240.98,2939.88 2258.98,2932.1 2258.98,2920.1
  region net D-: 2191.88,3013.6 2191.88,3038.6 2176.88,3031.1 2176.88,3021.1
  region net D+: 2191.88,3063.6 2191.88,3088.6 2176.88,3081.1 2176.88,3071.1
  region net VCC: 2530.73,2922.1 2530.73,2910.1 2544.11,2932.99 2541.62,2947.48
  region net SWD: 3222.82,2361.54 3200.5,2383.77 3222.92,2395.31 3234.26,2384.02
  region net RST: 3565.19,2406.09 3542.96,2383.77 3531.42,2406.19 3542.71,2417.53
  region net RST: 3576.44,2393.77 3555.2,2372.59 3574.28,2366.2 3582.78,2374.67
  region net D9: 3200.52,2726.21 3178.25,2703.94 3200.7,2692.44 3212.02,2703.76
  region net D9: 3188.28,2737.4 3167.02,2716.24 3160.7,2735.35 3169.21,2743.81
  region net D1/TX: 3587.48,2428.33 3609.75,2450.61 3576.14,2473.21 3564.83,2461.89
  region net D1/TX: 3620.98,2438.31 3599.73,2417.13 3618.81,2410.74 3627.31,2419.21
  region net A4/SDA: 3498.4,2339.25 3520.67,2361.53 3487.11,2384.18 3475.8,2372.86
  region net A2: 3476.14,2316.96 3453.84,2294.72 3442.38,2317.18 3453.7,2328.48
  region net D11/MOSI: 3143.73,2692.87 3122.48,2671.69 3116.15,2690.79 3124.65,2699.26
  region net D11/MOSI: 3155.97,2681.68 3133.73,2659.38 3156.2,2647.92 3167.49,2659.25
  region net D7: 3245.09,2770.72 3222.77,2748.5 3245.2,2736.96 3256.53,2748.25
  region net D7: 3232.74,2781.99 3211.6,2760.7 3205.17,2779.77 3213.63,2788.29
  region net D5: 3277.34,2826.51 3256.13,2805.29 3249.76,2824.38 3258.24,2832.87
  region net D5: 3289.62,2815.28 3267.33,2793.04 3289.76,2781.52 3301.09,2792.82
  region net PB6: 3498.43,2770.78 3476.1,2792.99 3464.67,2770.51 3476.01,2759.23
  region net PE4: 3587.46,2681.65 3565.23,2703.96 3553.7,2681.54 3564.99,2670.2
  region net D3: 3632.01,2637.11 3609.77,2659.41 3598.25,2636.97 3609.55,2625.64
  region net A0: 3267.35,2317 3245.05,2339.23 3267.48,2350.76 3278.81,2339.46
  region net A0: 3255.04,2305.75 3233.86,2327 3227.47,2307.92 3235.94,2299.42
  region net A6: 3178.24,2406.04 3156.01,2428.35 3178.48,2439.8 3189.77,2428.46
  region net D13/SCK: 3103.09,2464.53 3111.43,2472.88 3083.35,2463.6 3074.93,2451.6
  region net D13/SCK: 3133.69,2450.59 3111.45,2472.89 3133.91,2484.36 3145.21,2473.03
  region net D4: 3665.41,2715.05 3643.18,2737.36 3631.65,2714.93 3642.94,2703.6
  region net PE5: 3576.35,2804.16 3554.07,2826.42 3542.59,2803.97 3553.91,2792.66
  region net PB7: 3531.84,2848.73 3509.5,2870.94 3498.07,2848.46 3509.42,2837.18
  region net SWC: 3100.29,2372.64 3078.05,2394.95 3100.52,2406.4 3111.81,2395.07
  region net AREF: 3136.51,2319.78 3114.21,2342.02 3094.27,2315.3 3109.85,2299.76
  region net AREF: 3144.83,2328.1 3122.59,2350.4 3145.05,2361.87 3156.35,2350.54
  region net PE3: 3189.39,2283.58 3167.11,2305.84 3189.56,2317.34 3200.87,2306.03
  region net A1: 3233.96,2239.06 3211.63,2261.27 3234.04,2272.82 3245.39,2261.54
  region net A1: 3236.82,2242.99 3215.54,2264.14 3234.61,2270.56 3243.12,2262.1
  region net D2: 3687.67,2417.24 3665.47,2394.9 3653.91,2417.31 3665.19,2428.66
  region net D2: 3694.07,2410.84 3685.83,2381.99 3709.83,2391 3711.26,2403
  region net D0/RX: 3620.88,2350.38 3643.16,2372.65 3609.57,2395.28 3598.25,2383.97
  region net D0/RX: 3650.22,2365.45 3639.47,2337.44 3659.35,2339 3663.95,2351
  region net A5/SCL: 3598.63,2328.1 3576.33,2305.85 3564.86,2328.32 3576.19,2339.62
  region net A3: 3554.09,2283.55 3531.78,2261.32 3520.33,2283.79 3531.66,2295.08
  region net D6: 3199.36,2859.93 3178.19,2838.68 3171.79,2857.76 3180.26,2866.26
  region net D6: 3211.69,2848.67 3189.36,2826.45 3211.79,2814.91 3223.13,2826.2
  region net D8: 3167.15,2804.13 3144.82,2781.91 3167.25,2770.37 3178.59,2781.66
  region net D8: 3154.81,2815.39 3133.65,2794.13 3127.24,2813.2 3135.71,2821.71
  region net D10/SS: 3122.58,2759.62 3100.31,2737.34 3122.76,2725.86 3134.07,2737.17
  region net D10/SS: 3110.32,2770.82 3089.08,2749.64 3082.74,2768.74 3091.24,2777.21
  region net D12/MISO: 3077.99,2715.1 3055.79,2692.76 3078.28,2681.34 3089.56,2692.69
  region net D12/MISO: 3065.8,2726.26 3044.52,2705.11 3038.22,2724.23 3046.73,2732.69
  region net VCC: 3629.26,2767.99 3606.95,2790.21 3629.37,2801.75 3640.71,2790.46
  region net VCC: 3620.89,2759.62 3598.62,2781.88 3575.95,2748.34 3587.27,2737.02
  region net U2_6: 2508.17,2992.04 2505.17,2956.16 2482.09,2968.1 2483.42,2984.1
  region net D0/RX: 2597.21,2987.01 2567.9,2980.64 2572.73,3000.11 2584.73,3002.72
  region net D0/RX: 2600.75,2959.1 2600.75,2989.1 2608.83,2980.1 2608.83,2968.1
  region net 3V3: 3146.14,1701.06 3197.32,1708.94 3144.05,1748.24 3132.43,1728.74
  region net VCC: 3246.14,1701.06 3297.32,1708.94 3244.05,1748.24 3232.43,1728.74
  region net VIN: 3546.14,1701.06 3546.14,1708.94 3533.31,1680.72 3543.51,1662.64
  region net A1: 3886.73,1729.67 3856.73,1729.67 3865.73,1747.67 3877.73,1747.67
  region net A0: 3746.14,1706.36 3761.24,1732.28 3740.88,1744.34 3736.33,1731.92
  region net D8: 3415.27,3375.72 3388.76,3389.78 3388.03,3369.79 3399.12,3363.9
  region net D9: 3326.73,3380.33 3296.73,3380.33 3305.73,3362.33 3317.73,3362.33
  region net D10/SS: 3226.73,3380.33 3196.73,3380.33 3205.73,3362.33 3217.73,3362.33
  region net D11/MOSI: 3126.73,3380.33 3096.73,3380.33 3105.73,3362.33 3117.73,3362.33
  region net D12/MISO: 3026.73,3380.33 2996.73,3380.33 3005.73,3375 3017.73,3375
  region net A5/SCL: 2537.32,3408.94 2486.14,3408.94 2500.73,3441.94 2522.73,3441.94
  region net D0/RX: 4257.04,3380.11 4247.23,3408.46 4232.95,3394.7 4237.31,3382.09
  region net D1/TX: 4186.73,3380.33 4156.73,3380.33 4165.73,3362.33 4177.73,3362.33
  region net D2: 4097.32,3403.64 4082.22,3377.72 4102.59,3365.66 4107.13,3378.08
  region net D3: 3981.5,3377.41 3952.33,3384.38 3956.73,3364.82 3968.73,3361.96
  region net D4: 3897.32,3403.64 3882.22,3377.72 3902.58,3365.66 3907.13,3378.08
  region net D5: 3761.24,3377.72 3746.14,3403.64 3736.33,3378.08 3740.88,3365.66
  region net D6: 3661.24,3377.72 3646.14,3403.64 3636.33,3378.08 3640.88,3365.66
  region net D7: 3561.24,3377.72 3546.14,3403.64 3536.33,3378.08 3540.88,3365.66
  region net VCC: 4235.67,2280.59 4227.8,2229.41 4255.47,2215.7 4274.96,2227.33
  region net RST: 4233.09,2480.59 4259.01,2465.49 4271.07,2485.85 4258.65,2490.4
  region net RST: 4207.06,2440 4207.06,2470 4189.06,2461 4189.06,2449
  region net AREF: 2737.32,3503.64 2722.22,3477.72 2742.59,3465.66 2747.13,3478.08
  region net A5/SCL: 2537.32,3501.06 2486.14,3501.06 2500.73,3468.06 2522.73,3468.06
  region net VCC: 2997.32,1608.94 2946.14,1601.06 2999.41,1561.76 3011.03,1581.26
  region net VCC: 3297.32,1608.94 3246.14,1601.06 3299.41,1561.76 3311.03,1581.26
  region net VCC: 3297.32,1601.06 3246.14,1608.94 3232.43,1581.26 3244.05,1561.76
  region net +5V: 2293.73,2586.32 2293.73,2625.69 2263.73,2616 2263.73,2596
  region net VCC: 2349.73,2574.69 2349.73,2535.31 2351.73,2544 2351.73,2566
  region net VCC: 2349.73,2574.69 2349.73,2535.31 2351.73,2544 2351.73,2566
  region net 3V3: 2349.73,2523.68 2293.73,2484.31 2350.17,2445.15 2385.88,2470.25
  region net R5_1: 2526.13,2580 2526.13,2610 2508.13,2601 2508.13,2589
  region net R2_1: 2526.13,2500 2526.13,2530 2508.13,2521 2508.13,2509
  region net D13/SCK: 2456.73,2662.6 2486.73,2662.6 2477.73,2680.6 2465.73,2680.6
  region net R5_1: 2489.73,2602.6 2489.73,2580 2507.73,2589 2507.73,2601
  region net VCC: 2453.73,2447.4 2453.73,2471.4 2447.33,2470.4 2447.33,2448.4
  region net VCC: 2489.73,2471.4 2489.73,2447.4 2517.33,2448.4 2517.33,2470.4
  region net R2_1: 2489.73,2530 2489.73,2507.4 2507.73,2509 2507.73,2521
  region net VCC: 2530.73,3043.67 2525.66,3014.1 2541.63,3000.72 2544.11,3015.2
  region net D0/RX: 2590.73,3014.1 2566.73,3014.1 2572.73,2996.1 2584.73,2996.1
  region net 3V3: 2612.15,1933.19 2612.15,1956.81 2623.17,1956 2623.17,1934
  region net VCC: 3969.31,2832.69 3969.31,2856.31 3958.29,2855.5 3958.29,2833.5
  region net VCC: 3990.15,2832.69 3990.15,2856.31 4001.17,2855.5 4001.17,2833.5
  region net VCC: 4008.32,2832.69 4008.32,2856.31 3997.29,2855.5 3997.29,2833.5
  region net A5/SCL: 3281.41,2614.06 3303.48,2622.47 3302.51,2610.31 3290.22,2605.62
  region net A4/SDA: 3269.97,2599.72 3260.62,2578.03 3272.86,2578.58 3277.98,2590.44
  region net D3: 3978.08,3189.41 3956.64,3179.5 3956.73,3191.69 3968.73,3197.23
  region net D4: 3924.38,3148.41 3945.82,3138.5 3945.73,3150.68 3933.73,3156.23
  region net D0/RX: 2630.72,2979.28 2614.02,2995.99 2610.33,2984.08 2618.81,2975.6
  region net D1/TX: 2469.32,3014.29 2469.32,3037.91 2458.29,3034.1 2458.29,3018.1
  region net PB7: 3639.43,3131.25 3666.56,3104.1 3669.91,3126.09 3661.43,3134.58
  region net PB6: 3780.83,2989.83 3807.98,2962.7 3811.31,2984.69 3802.82,2993.18
  region net D+: 1994.22,3056.59 2020.72,3030.05 1998.62,3027.41 1991.55,3034.49
  region net D+: 2017.59,3079.95 2044.12,3053.45 2046.76,3075.55 2039.68,3082.62
  region net D-: 2096.36,3030.05 2122.86,3056.58 2125.52,3034.48 2118.46,3027.41
  region net +5V: 2096.36,2930.05 2122.86,2956.58 2126.23,2935.19 2117.75,2926.7
  region net +5V: 2121.36,2963.66 2103.58,2930.65 2124.9,2933.34 2130.85,2944.37
  region net RST: 2159.23,3388.55 2159.21,3344.26 2179.89,3360.4 2179.89,3372.4
  region net RST: 2159.22,3344.27 2159.22,3388.55 2179.89,3372.41 2179.89,3360.41
  region net 3V3: 2371.73,2135 2371.73,1905 2631.73,1905 2631.73,2135
Bottom Layer:
  region net PE4: 2697.32,1608.94 2646.14,1608.94 2660.73,1641.94 2682.73,1641.94
  region net PE5: 2597.32,1608.94 2546.14,1608.94 2560.73,1641.94 2582.73,1641.94
  region net PE3: 2786.73,1729.67 2756.73,1729.67 2765.73,1747.67 2777.73,1747.67
  region net PE4: 2684.23,1731.27 2659.23,1731.27 2666.73,1746.27 2676.73,1746.27
  region net PE4: 2697.32,1701.06 2646.14,1701.06 2660.73,1668.06 2682.73,1668.06
  region net PE5: 2596.81,1714.03 2580.5,1732.98 2596.75,1737.09 2603.29,1729.49
  region net PE5: 2597.32,1701.06 2546.14,1701.06 2560.73,1668.06 2582.73,1668.06
  region net SWD: 3227.27,2370.62 3209.56,2388.26 3225.46,2393.6 3232.55,2386.54
  region net RST: 3547.28,2409.14 3542.12,2384.67 3528.97,2395 3531.08,2405
  region net A4/SDA: 3531.86,2349.3 3510.72,2328.01 3529.83,2321.71 3538.29,2330.23
  region net A2: 3487.33,2304.71 3466.13,2283.49 3485.22,2277.13 3493.7,2285.62
  region net PB6: 3509.61,2783.02 3488.4,2804.24 3507.49,2810.6 3515.98,2802.11
  region net PE4: 3578.41,2677.19 3560.73,2694.88 3555.43,2678.97 3562.5,2671.89
  region net D3: 3643.24,2649.39 3622.03,2670.61 3641.12,2676.97 3649.6,2668.48
  region net A6: 3160.88,2393.24 3143.15,2410.86 3137.9,2394.94 3144.99,2387.89
  region net D4: 3673.78,2723.43 3665.43,2715.07 3693.38,2724.4 3701.71,2736.4
  region net PE5: 3567.28,2799.68 3549.6,2817.35 3544.3,2801.44 3551.38,2794.37
  region net PB7: 3509.53,2870.97 3517.88,2879.32 3530.93,2906.89 3518.93,2898.71
  region net SWC: 3104.78,2381.7 3087.13,2399.41 3103.05,2404.68 3110.11,2397.6
  region net PE3: 3177.11,2272.36 3155.91,2293.58 3149.54,2274.49 3158.02,2266
  region net A5/SCL: 3609.81,2315.87 3588.65,2294.61 3607.76,2288.29 3616.22,2296.8
  region net A3: 3565.28,2271.33 3544.1,2250.08 3563.2,2243.74 3571.67,2252.24
  region net A6: 2897.32,1701.06 2846.14,1701.06 2860.73,1668.06 2882.73,1668.06
  region net VCC: 2997.32,1701.06 2946.14,1701.06 2960.73,1668.06 2982.73,1668.06
  region net RST: 3097.32,1701.06 3046.14,1701.06 3060.73,1668.06 3082.73,1668.06
  region net RST: 3084.23,1731.27 3059.23,1731.27 3066.73,1746.27 3076.73,1746.27
  region net 3V3: 3197.32,1701.06 3146.14,1701.06 3160.73,1668.06 3182.73,1668.06
  region net VCC: 3297.32,1701.06 3246.14,1701.06 3260.73,1668.06 3282.73,1668.06
  region net VIN: 3597.32,1701.06 3546.14,1701.06 3560.73,1668.06 3582.73,1668.06
  region net A5/SCL: 4297.32,1701.06 4246.14,1701.06 4260.73,1668.06 4282.73,1668.06
  region net A5/SCL: 4246.14,1706.36 4261.24,1732.28 4240.88,1744.34 4236.33,1731.92
  region net A4/SDA: 4197.32,1701.06 4146.14,1701.06 4160.73,1668.06 4182.73,1668.06
  region net A4/SDA: 4161.9,1724.69 4146.22,1699.12 4135.49,1716.06 4141.94,1726.58
  region net A3: 4097.32,1701.06 4046.14,1701.06 4060.73,1668.06 4082.73,1668.06
  region net A3: 4086.73,1729.67 4056.73,1729.67 4065.73,1743.7 4077.73,1743.7
  region net A2: 3997.32,1701.06 3946.14,1701.06 3960.73,1668.06 3982.73,1668.06
  region net A2: 3986.73,1729.67 3956.73,1729.67 3965.73,1747.67 3977.73,1747.67
  region net A1: 3897.32,1701.06 3846.14,1701.06 3860.73,1668.06 3882.73,1668.06
  region net A0: 3797.32,1701.06 3746.14,1701.06 3760.73,1668.06 3782.73,1668.06
  region net D8: 3437.32,3408.94 3386.14,3408.94 3400.73,3441.94 3422.73,3441.94
  region net D9: 3337.32,3408.94 3286.14,3408.94 3300.73,3441.94 3322.73,3441.94
  region net D10/SS: 3237.32,3408.94 3186.14,3408.94 3200.73,3441.94 3222.73,3441.94
  region net D11/MOSI: 3137.32,3408.94 3086.14,3408.94 3100.73,3441.94 3122.73,3441.94
  region net D12/MISO: 3037.32,3408.94 2986.14,3408.94 3000.73,3441.94 3022.73,3441.94
  region net D13/SCK: 2937.32,3408.94 2886.14,3408.94 2900.73,3441.94 2922.73,3441.94
  region net AREF: 2737.32,3408.94 2686.14,3408.94 2700.73,3441.94 2722.73,3441.94
  region net A4/SDA: 2637.32,3408.94 2586.14,3408.94 2600.73,3441.94 2622.73,3441.94
  region net A5/SCL: 2496.62,3380.41 2487.39,3408.96 2472.8,3395.56 2476.95,3382.73
  region net D0/RX: 4297.32,3408.94 4246.14,3408.94 4260.73,3441.94 4282.73,3441.94
  region net D0/RX: 4262.96,3377.02 4246.65,3395.97 4240.17,3380.51 4246.71,3372.91
  region net D1/TX: 4197.32,3408.94 4146.14,3408.94 4160.73,3441.94 4182.73,3441.94
  region net D1/TX: 4184.23,3378.73 4159.23,3378.73 4166.73,3363.73 4176.73,3363.73
  region net D2: 4097.32,3408.94 4046.14,3408.94 4060.73,3441.94 4082.73,3441.94
  region net D3: 3997.32,3408.94 3946.14,3408.94 3960.73,3441.94 3982.73,3441.94
  region net D4: 3897.32,3408.94 3846.14,3408.94 3860.73,3441.94 3882.73,3441.94
  region net D5: 3797.32,3408.94 3746.14,3408.94 3760.73,3441.94 3782.73,3441.94
  region net D6: 3697.32,3408.94 3646.14,3408.94 3660.73,3441.94 3682.73,3441.94
  region net D7: 3597.32,3408.94 3546.14,3408.94 3560.73,3441.94 3582.73,3441.94
  region net VCC: 4227.8,2280.59 4235.67,2229.41 4274.96,2282.67 4255.47,2294.3
  region net SWD: 4222.7,2380.08 4203.75,2363.77 4199.64,2380.02 4207.24,2386.56
  region net SWC: 4212.01,2534.86 4202.37,2557.93 4191.27,2545.6 4195.43,2535.63
  region net D8: 3437.32,3501.06 3386.14,3501.06 3400.73,3468.06 3422.73,3468.06
  region net D9: 3337.32,3501.06 3286.14,3501.06 3300.73,3468.06 3322.73,3468.06
  region net D10/SS: 3237.32,3501.06 3186.14,3501.06 3200.73,3468.06 3222.73,3468.06
  region net D11/MOSI: 3137.32,3501.06 3086.14,3501.06 3100.73,3468.06 3122.73,3468.06
  region net D12/MISO: 3037.32,3501.06 2986.14,3501.06 3000.73,3468.06 3022.73,3468.06
  region net D13/SCK: 2937.32,3501.06 2886.14,3501.06 2900.73,3468.06 2922.73,3468.06
  region net AREF: 2737.32,3501.06 2686.14,3501.06 2700.73,3468.06 2722.73,3468.06
  region net A4/SDA: 2601.24,3477.72 2586.14,3503.64 2576.33,3478.08 2580.88,3465.66
  region net A4/SDA: 2637.32,3501.06 2586.14,3501.06 2600.73,3468.06 2622.73,3468.06
  region net D0/RX: 4297.32,3501.06 4246.14,3501.06 4260.73,3468.06 4282.73,3468.06
  region net D1/TX: 4197.32,3501.06 4146.14,3501.06 4160.73,3468.06 4182.73,3468.06
  region net D2: 4097.32,3501.06 4046.14,3501.06 4060.73,3468.06 4082.73,3468.06
  region net D3: 3997.32,3501.06 3946.14,3501.06 3960.73,3468.06 3982.73,3468.06
  region net D4: 3897.32,3501.06 3846.14,3501.06 3860.73,3468.06 3882.73,3468.06
  region net D5: 3797.32,3501.06 3746.14,3501.06 3760.73,3468.06 3782.73,3468.06
  region net D6: 3697.32,3501.06 3646.14,3501.06 3660.73,3468.06 3682.73,3468.06
  region net D7: 3597.32,3501.06 3546.14,3501.06 3560.73,3468.06 3582.73,3468.06
  region net A6: 2897.32,1608.94 2846.14,1608.94 2860.73,1641.94 2882.73,1641.94
  region net A6: 2862.96,1632.98 2846.65,1614.03 2840.17,1629.49 2846.71,1637.09
  region net VCC: 2997.32,1608.94 2946.14,1608.94 2960.73,1641.94 2982.73,1641.94
  region net RST: 3097.32,1608.94 3046.14,1608.94 3060.73,1641.94 3082.73,1641.94
  region net 3V3: 3197.32,1608.94 3146.14,1608.94 3160.73,1641.94 3182.73,1641.94
  region net VCC: 3297.32,1608.94 3246.14,1608.94 3260.73,1641.94 3282.73,1641.94
  region net VIN: 3597.32,1608.94 3546.14,1608.94 3560.73,1641.94 3582.73,1641.94
  region net A5/SCL: 4297.32,1608.94 4246.14,1608.94 4260.73,1641.94 4282.73,1641.94
  region net A4/SDA: 4197.32,1608.94 4146.14,1608.94 4160.73,1641.94 4182.73,1641.94
  region net A3: 4097.32,1608.94 4046.14,1608.94 4060.73,1641.94 4082.73,1641.94
  region net A2: 3997.32,1608.94 3946.14,1608.94 3960.73,1641.94 3982.73,1641.94
  region net A1: 3897.32,1608.94 3846.14,1608.94 3860.73,1641.94 3882.73,1641.94
  region net A0: 3797.32,1608.94 3746.14,1608.94 3760.73,1641.94 3782.73,1641.94
  region net VCC: 3990.15,2832.69 3990.15,2856.31 4001.17,2855.5 4001.17,2833.5
  region net VCC: 4008.32,2832.69 4008.32,2856.31 3997.29,2855.5 3997.29,2833.5
  region net VCC: 4029.15,2832.69 4029.15,2856.31 4040.17,2855.5 4040.17,2833.5
  region net A5/SCL: 3281.36,2614.09 3275.85,2637.06 3266.45,2629 3269.32,2617
  region net A4/SDA: 3252.03,2608.31 3241.01,2587.41 3233.6,2597 3239.93,2609
  region net D3: 3978.08,3160.59 3956.64,3170.5 3956.73,3158.31 3968.73,3152.77
  region net D4: 3923.66,3119.93 3945.58,3128.74 3944.73,3116.52 3932.73,3111.69
  region net D0/RX: 2644.73,2990.21 2632.61,3010.48 2645.15,3011 2651.12,3001
  region net D1/TX: 2490.15,3014.29 2490.15,3037.91 2501.17,3031.1 2501.17,3021.1
  region net PB7: 3615.48,3107.3 3642.64,3080.17 3620.64,3076.82 3612.15,3085.31
  region net PB6: 3756.9,2965.9 3784.03,2938.75 3762.04,2935.42 3753.55,2943.91
  region net 3V3: 2385.73,2136 2384.73,1905 2617.73,1905 2617.73,2019 2617.73,2076 2617.73,2104 2617.73,2134

## Silkscreen, mask and mechanical layers (free items; w line width, h text height)
Top Overlay:
  lines w7.87 net S$2224: 3657.67,2693.93 3647.67,2703.93 ; 3647.67,2703.93 3677.67,2673.93 3647.67,2673.93 3647.67,2703.93
  lines w7.87 net S$2229: 4069.73,2620 4069.73,2660 4089.73,2640 4069.73,2620 ; 4209.73,2628 4249.73,2628 4229.73,2608 4209.73,2628
  lines w10: 3111.73,3235 cw(c3111.73,3245) 3111.73,3255 ccw(c3111.73,3265) 3111.73,3275 ; 3211.73,3235 cw(c3211.73,3245) 3211.73,3255 ccw(c3211.73,3265) 3211.73,3275 ; 3311.73,3235 cw(c3311.73,3245) 3311.73,3255 ccw(c3311.73,3265) 3311.73,3275 ; 3671.73,3235 cw(c3671.73,3245) 3671.73,3255 ccw(c3671.73,3265) 3671.73,3275 ; 3771.73,3235 cw(c3771.73,3245) 3771.73,3255 ccw(c3771.73,3265) 3771.73,3275 ; 3981.73,3235 cw(c3981.73,3245) 3981.73,3255 ccw(c3981.73,3265) 3981.73,3275
  text "RSTN" at 1790.08,3530 h43.31 r270
  text "11" at 3115.03,3324.02 h35.43 r180
  text "4" at 3862.7,3322.21 h35.43 r234
  text "8" at 3398.02,3318 h35.43 r270
  text "7" at 3565.08,3317.32 h35.43 r245
  text "9" at 3293.38,3312.56 h35.43 r275
  text "5" at 3758.52,3309.83 h35.43 r270
  text "3" at 3968.52,3309.83 h35.43 r270
  text "2" at 4064.02,3309.83 h35.43 r270
  text "6" at 3659.38,3306.56 h35.43 r275
  text "13" at 2928.75,3293.8 h35.43 r90
  text "12" at 3028.75,3293.8 h35.43 r90
  text "10" at 3228.75,3293.8 h35.43 r90
  text "SCL" at 2528.75,3247.7 h35.43 r90
  text "GND" at 2828.75,3244.5 h35.43 r90
  text "SDA" at 2628.75,3242.9 h35.43 r90
  text "AREF" at 2738.75,3212.9 h35.43 r90
  text "TX->1" at 4183.95,3181.93 h35.43 r90
  text "RX<-0" at 4293.95,3167.12 h35.43 r89
  text "DAC0" at 3896.35,3160.5 h35.43 r90
  text "PB7" at 3634.26,3037.53 h35.43 r135
  text "LGT8F328P" at 2664.73,2945.41 h51.18
  text "PB6" at 3774.26,2897.53 h35.43 r135
  text "UNO" at 2666.73,2826 h66
  text "LD13" at 2534.73,2654.75 h43.31
  text "SWC" at 3988.73,2535.28 h35.43
  text "VCC" at 2421.95,2505 h35.43 r90
  text "RSTN" at 3967.73,2435.28 h35.43
  text "PWR" at 2531.73,2409.75 h43.31
  text "SWD" at 3989.73,2335.28 h35.43
  text "VCC" at 3992.73,2235.28 h35.43
  text "JLCJLCJLCJLC" at 4399.73,2156 h40 r90
  text "GND" at 3997.73,2135.28 h35.43
  text "A6" at 2888.95,1789 h35.43 r90
  text "IOREF" at 2992.76,1787.3 h35.43 r90
  text "Vin" at 3590.35,1787 h35.43 r90
  text "3V3" at 3192.75,1785.9 h35.43 r90
  text "GND" at 3491.76,1785.5 h35.43 r90
  text "A0" at 3788.75,1786.1 h35.43 r90
  text "A2" at 3988.75,1786.1 h35.43 r90
  text "A3" at 4088.75,1786.1 h35.43 r90
  text "A5" at 4288.75,1786.1 h35.43 r90
  text "RSTN" at 3091.45,1785 h35.43 r90
  text "VCC" at 3283.95,1785 h35.43 r90
  text "GND" at 3393.45,1785 h35.43 r90
  text "A1" at 3889.45,1785 h35.43 r90
  text "A4" at 4189.45,1785 h35.43 r90
  text "PE3/A7" at 2795.22,1775.93 h35.43 r93
  text "PE5" at 2593.95,1775 h35.43 r90
  text "PE4" at 2693.95,1775 h35.43 r90
  text "VCC" at 3689.45,1775 h35.43 r90

## Text inside footprints (layer, text, board x,y; h text height)
SJ1: Top Overlay "3V3" at 2268.75,2442.9 h35.43 r90; Top Overlay "+5V" at 2269.45,2575 h35.43 r90
U0: Document "孔径不能小于0.5mm" at 3371.73,2024.67 h80 r135